# Altium PCB 800U R3N3_LED_V1.2.PcbDoc (part 2 of 2)
Units mm, origin at the board's own origin, x right, y up, seen from the top; angles counter-clockwise.
Board outline 308.48 x 220.22 mm, 4 copper layers (Top Layer, Mid-Layer 2, GND, Bottom Layer); 102 components, 70 nets, 266 pads, 117 vias.
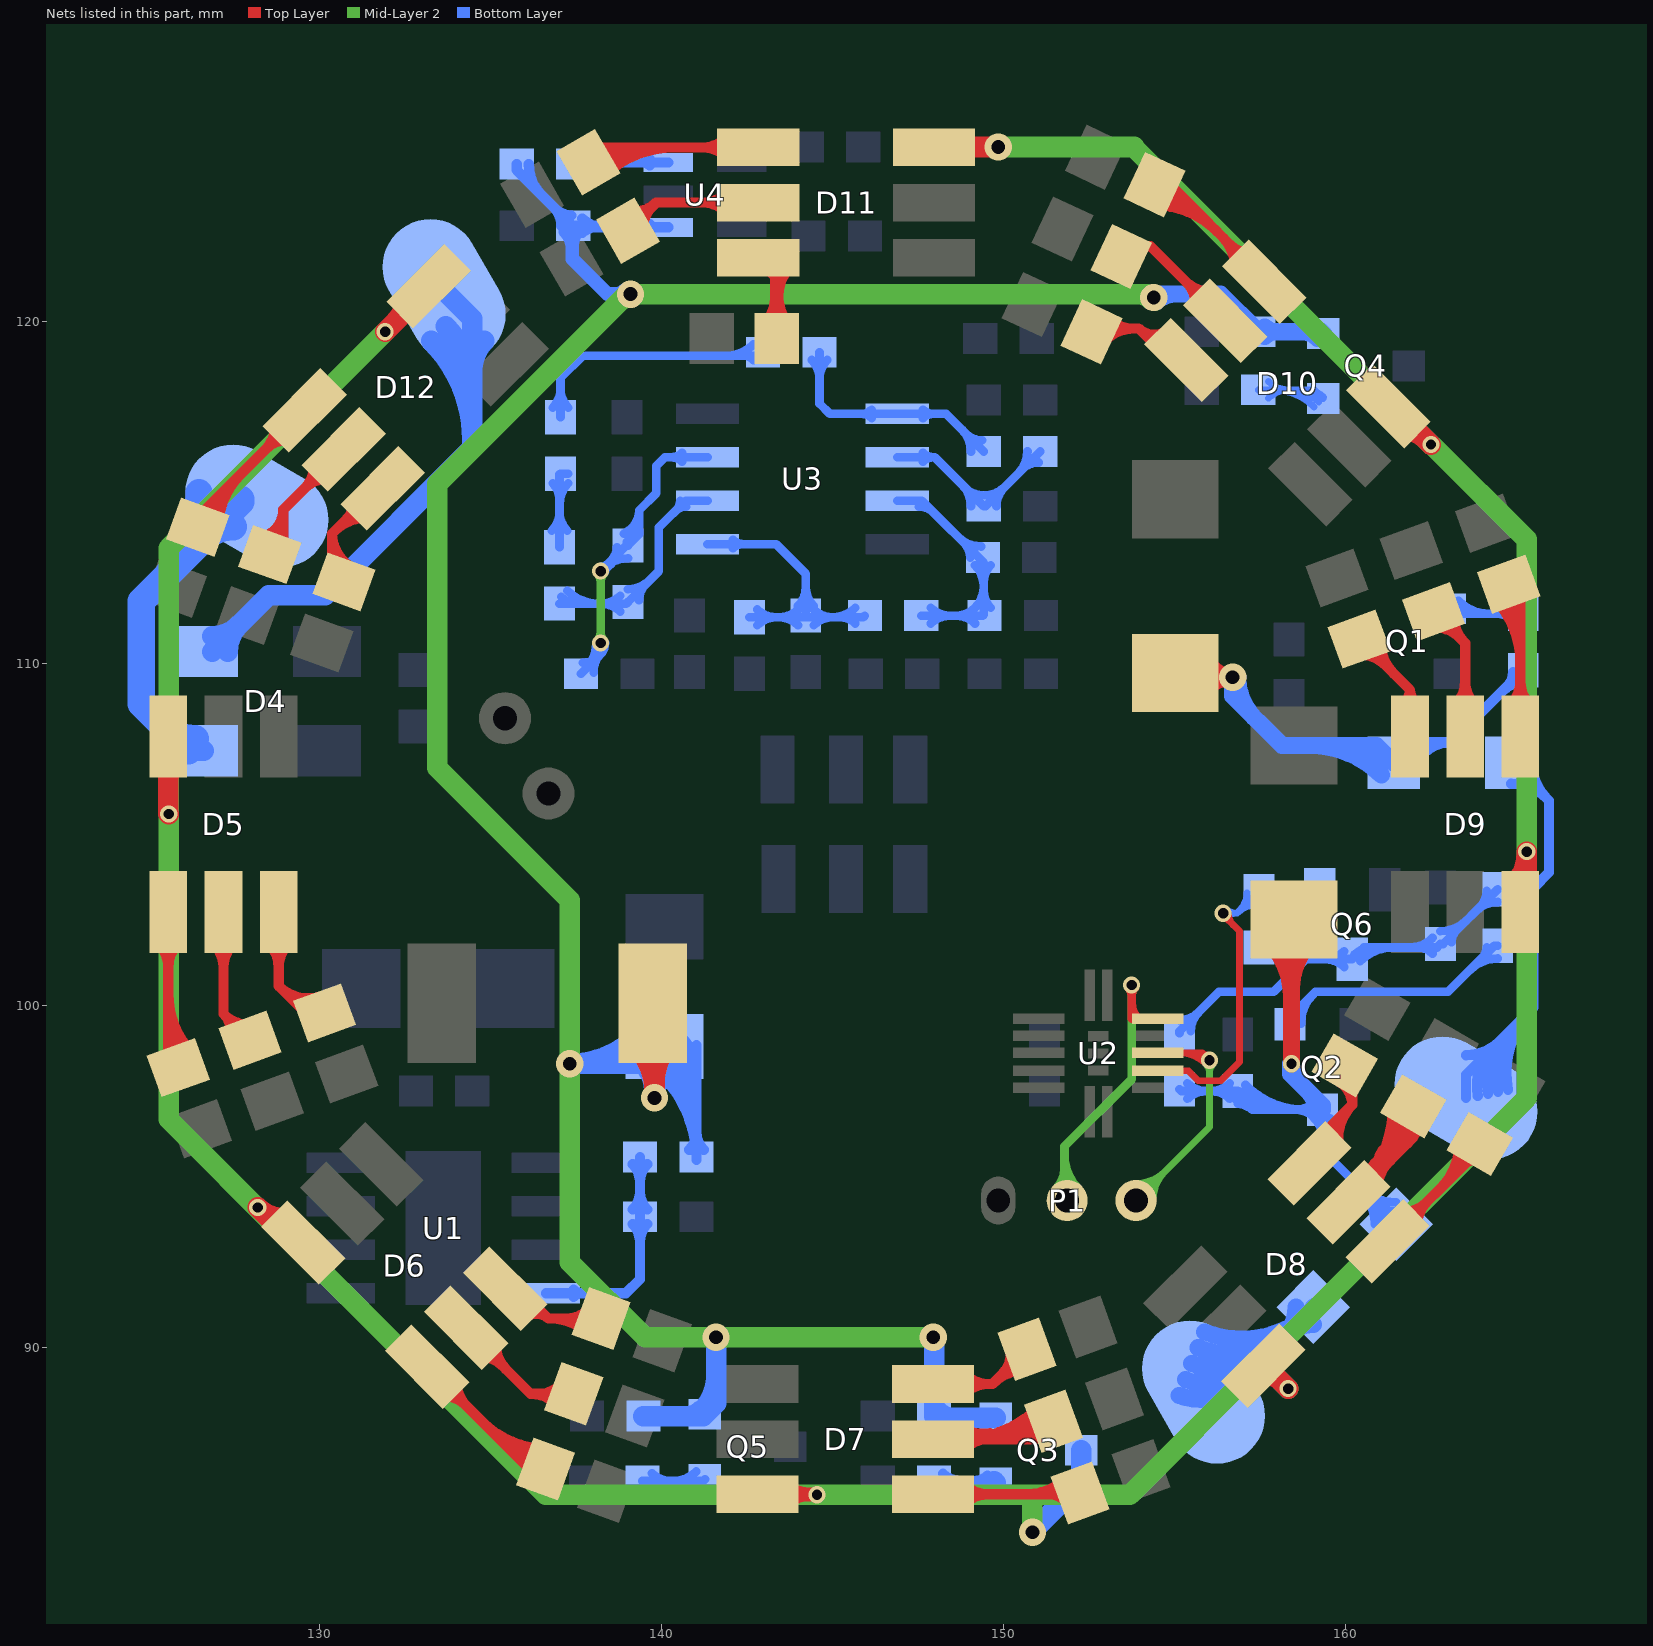
[diagram p4: the nets of this part, all layers, seen from the top]

## Via types
v1: diameter 0.5, hole 0.3, Top Layer to Bottom Layer, 103 vias
v2: diameter 0.8, hole 0.4, Top Layer to Bottom Layer, 12 vias
v3: diameter 0.6, hole 0.3, Top Layer to Bottom Layer, 2 vias

## Nets (pads, with @x,y where several pads share a name; then routed paths per layer and width w, separated by ;. In a path a pad name is that pad's centre, name@x,y a point inside that pad or via, vN(x,y) a via of type N, cw(c..) or ccw(c..) an arc to the next point about the centre after c; other vN are vias at no path point) (continued)
NetC6_1: C6.1 R3.2 | length 9.8
  Bottom Layer w0.254: C6.1@136.822,117.478 ccw(c136.27,118.03) 137.05,118.03 ccw(c137.83,118.03) C6.1@137.278,117.478 ; C6.1@137.05,117.2 137.05,118.35 137.7,119 142.875,119 R3.2@142.975,119.1 ; 141.904,119 ccw(c141.904,120.121) R3.2@142.697,119.328 ; 142.387,119 cw(c142.387,118.562) R3.2@142.697,118.872
NetC6_2: C6.2 R12.1 | length 4.8
  Bottom Layer w0.254: R12.1@136.797,113.878 ccw(c136.245,114.43) 137.025,114.43 ccw(c137.805,114.43) R12.1@137.253,113.878 ; C6.2@136.822,115.272 cw(c136.331,114.781) 137.025,114.781 ; R12.1@137.025,113.4 137.025,115.525 C6.2@137.05,115.55 C6.2@137.275,115.55 ; 137.025,114.66 cw(c137.89,114.66) C6.2@137.278,115.272
NetC9_1: C9.1 R15.2 R16.2 U3.5 | length 14.6
  Bottom Layer w0.254: U3.5@141.35,113.49 143.36,113.49 144.225,112.625 C9.1@144.225,111.4 ; U3.5@142.097,113.368 cw(c142.393,113.072) 142.393,113.49 cw(c142.393,113.908) U3.5@142.097,113.612 ; R16.2@142.575,111.35 145.9,111.35 R15.2@145.95,111.4 ; R16.2@142.803,111.122 cw(c143.355,110.57) 143.355,111.35 cw(c143.355,112.13) R16.2@142.803,111.578 ; C9.1@143.997,111.122 ccw(c143.445,110.57) 143.445,111.35 ccw(c143.445,112.13) C9.1@143.997,111.578 ; C9.1@143.997,111.678 ccw(c143.445,112.23) 144.225,112.23 ccw(c145.005,112.23) C9.1@144.453,111.678 ; C9.1@144.453,111.122 cw(c145.005,110.57) 145.005,111.35 cw(c145.005,112.13) C9.1@144.453,111.578 ; 145,111.35 ccw(c145,112.3) R15.2@145.672,111.628 ; 145.241,111.35 cw(c145.241,110.741) R15.2@145.672,111.172
NetC10_1: C10.1 R14.2 R15.1 U3.3 | length 13.3
  Bottom Layer w0.254: U3.3@146.9,114.76 147.615,114.76 149.425,112.95 149.425,111.425 149.4,111.4 R15.1@147.6,111.4 ; U3.3@147.525,114.587 cw(c147.525,113.952) 147.974,114.401 ; R15.1@147.878,111.172 cw(c148.43,110.62) 148.43,111.4 cw(c148.43,112.18) R15.1@147.878,111.628 ; 148.671,113.704 ccw(c149.35,114.384) C10.1@149.35,113.423 ; 148.852,113.523 cw(c148.428,113.1) C10.1@149.027,113.1 ; R14.2@149.172,111.172 ccw(c148.62,110.62) 148.62,111.4 ccw(c148.62,112.18) 149.172,111.628 ccw(c148.56,112.24) 149.425,112.24 ; C10.1@149.172,112.872 cw(c148.56,112.26) 149.425,112.26 ; 149.425,112.119 ccw(c150.119,112.119) R14.2@149.628,111.628 ; 149.425,112.381 cw(c150.119,112.381) C10.1@149.628,112.872
NetC11_1: C11.1 D3.2 F1.2 Q2.3 R28.2 | length 33
  Top Layer w0.5: D3.2@157.742,101.889 cw(c156.092,100.239) 158.425,100.239 ; v1(158.425,98.3) D3.2@158.425,102.2 ; 158.425,100.49 cw(c160.403,100.49) D3.2@159.004,101.889
  Bottom Layer w0.254: R28.2@155.15,97.55 155.2,97.5 C11.1@156.85,97.5 156.85,97.375 157.275,96.95 ; R28.2@155.378,97.272 cw(c155.93,96.72) 155.93,97.5 cw(c155.93,98.28) R28.2@155.378,97.728 ; C11.1@156.622,97.272 ccw(c156.07,96.72) 156.07,97.5 ccw(c156.07,98.28) C11.1@156.622,97.728 ; C11.1@156.719,97.319 ccw(c157.61,98.21) 157.61,96.95 ; C11.1@156.85,97.127 cw(c156.85,96.528) 157.273,96.952 ; C11.1@156.899,97.499 ccw(c158.224,98.824) 158.224,96.95 ; C11.1@157.078,97.678 ccw(c158.837,99.437) 158.837,96.95 ; C11.1@157.162,97.368 ccw(c157.582,97.257) 157.275,96.95 ; Q2.3@159.097,96.697 cw(c158.545,96.145) 159.325,96.145 cw(c160.105,96.145) Q2.3@159.553,96.697 ; Q2.3@159.097,96.722 ccw(c158.545,96.17) 158.545,96.95 ccw(c158.545,97.73) Q2.3@159.097,97.178 ; F1.2@160.852,93.612 ccw(c159.319,93.612) 160.403,94.696 ccw(c161.487,95.78) F1.2@161.487,94.247 ; F1.2@161.106,93.612 ccw(c160.187,93.612) 160.837,94.263 ccw(c161.487,94.913) F1.2@161.487,93.993 ; F1.2@161.487,93.612 159.325,95.775 Q2.3@159.325,96.95 157.275,96.95
  Bottom Layer w0.5: v1@158.4,98.3 158.4,98 159.325,97.075 Q2.3@159.325,96.95 ; v1(158.425,98.3) ccw(c159.21,98.3) 158.655,97.745 ; 158.913,97.487 cw(c158.401,96.975) Q2.3@159.125,96.975
NetD2_2: D2.2 F2.1 R5.1 | length 24.6
  Top Layer w0.5: D2.2@155.025,109.72 155.145,109.6 v2(156.7,109.6) ; D2.2@155.866,109.183 cw(c156.7,108.557) v2(156.7,109.6) ; D2.2@155.97,110.077 ccw(c156.7,110.396) v2(156.7,109.6)
  Bottom Layer w0.3: F2.1@161.411,107.1 162.011,107.7 163.1,107.7 ; F2.1@161.422,107.096 cw(c162.264,106.811) 162.264,107.7 ; F2.1@161.706,107 cw(c162.682,106.67) 162.682,107.7 ; F2.1@161.99,106.904 cw(c163.1,106.529) 163.1,107.7 ; 164.603,109.203 cw(c165.2,108.605) R5.1@165.2,109.45 ; 164.723,109.323 ccw(c164.296,109.75) R5.1@164.9,109.75 ; R5.1@165.2,109.8 163.1,107.7
  Bottom Layer w0.5: v2(156.7,109.6) 156.7,109.05 158.15,107.6 160.911,107.6 F2.1@161.411,107.1 ; v2@156.85,109.6 ccw(c158.54,109.6) 157.345,108.405 ; 158.967,107.6 cw(c158.967,104.657) F2.1@161.048,106.738 ; 160.174,107.6 cw(c160.174,105.864) F2.1@161.402,107.092
NetD4_2: D4.2 V-.1 | length 23
  Bottom Layer w0.6: D4.2@126.875,110.35 128.525,112 130.175,112 134.475,116.3 134.475,120.075 V-.1@133.65,120.9 ; D4.2@126.875,110.8 ccw(c126.875,111.886) 127.643,111.118 ccw(c128.411,110.35) D4.2@127.325,110.35 ; V-.1@133.272,119.429 cw(c130.368,116.526) 134.475,116.526 ; V-.1@133.696,119.854 cw(c131.817,117.974) 134.475,117.974 ; 134.475,118.578 cw(c135.68,118.578) V-.1@134.828,119.429
NetD4_3: D4.3 V+.1 | length 14.4
  Bottom Layer w0.6: D4.3@126.175,107.45 D4.3@126.625,107.45
  Bottom Layer w0.8: 125.427,112.452 ccw(c122.878,115) V+.1@126.482,115 ; 125.436,108.189 ccw(c126.375,109.128) D4.3@126.375,107.8 ; D4.3@126.175,107.45 124.8,108.825 124.8,111.825 127.7,114.725 V+.1@127.7,114.8 ; 126.616,113.641 cw(c127.482,112.776) V+.1@127.482,114
NetD5_1: D5.1 R17.2 | length 10.4
  Top Layer w0.3: D5.1@125.304,101.802 cw(c124.621,101.119) 125.587,101.119 cw(c126.553,101.119) D5.1@125.87,101.802 ; 125.587,98.901 ccw(c126.65,98.901) R17.2@125.898,98.149 ; 125.587,99.625 ccw(c127.374,99.625) R17.2@126.111,98.361 ; 125.587,100.349 ccw(c128.099,100.349) R17.2@126.323,98.573 ; D5.1@125.587,102.735 125.587,98.473 R17.2@125.875,98.185
NetD5_2: D5.2 R18.2 | length 7
  Top Layer w0.3: D5.2@126.917,101.802 cw(c126.234,101.119) 127.2,101.119 cw(c128.166,101.119) D5.2@127.483,101.802 ; D5.2@127.2,102.735 127.2,99.761 R18.2@127.975,98.985 ; 127.2,99.761 cw(c126.68,99.24) R18.2@127.395,99.068 ; 127.246,99.714 ccw(c127.881,100.349) R18.2@127.881,99.451
NetD5_3: D5.3 R31.2 | length 6.9
  Top Layer w0.3: D5.3@128.53,101.802 cw(c127.847,101.119) 128.813,101.119 cw(c129.779,101.119) D5.3@129.096,101.802 ; D5.3@128.813,102.735 128.813,100.573 R31.2@129.6,99.785 ; 128.813,100.572 ccw(c129.685,101.445) R31.2@129.949,100.24 ; 129.201,100.185 ccw(c129.825,100.809) R31.2@130.013,99.947
NetD6_1: D6.1 R32.2 | length 10.7
  Top Layer w0.3: D6.1@133.155,89.445 136.15,86.45 R32.2@136.615,86.45 ; D6.1@133.614,88.586 cw(c133.614,87.62) 134.297,88.303 cw(c134.98,88.986) D6.1@134.014,88.986 ; 134.784,87.816 ccw(c136.649,89.681) R32.2@136.649,87.044 ; 135.296,87.304 ccw(c136.649,88.657) R32.2@136.649,86.744 ; 135.808,86.792 ccw(c136.649,87.633) R32.2@136.649,86.444
NetD6_2: D6.2 R33.2 | length 7.2
  Top Layer w0.3: D6.2@134.295,90.586 134.295,90.53 136.175,88.65 ; D6.2@134.755,89.726 cw(c134.755,88.896) 135.342,89.483 ; D6.2@135.155,90.126 ccw(c136.256,90.126) 135.477,89.348 ; 136.425,88.65 ccw(c136.425,89.536) R33.2@137.052,88.909 ; R33.2@137.014,88.245 ccw(c136.175,87.579) 136.175,88.65 ; R33.2@137.44,88.65 136.175,88.65
NetD6_3: D6.3 R34.2 | length 6.9
  Top Layer w0.3: D6.3@135.436,91.726 135.824,91.726 136.7,90.85 ; D6.3@135.947,91.181 cw(c136.149,90.843) D6.3@136.428,91.122 ; D6.3@136.101,90.924 cw(c136.353,90.503) 136.7,90.85 ; 136.771,90.85 cw(c136.771,89.322) R34.2@137.852,90.402 ; 137.225,90.85 ccw(c137.225,91.736) R34.2@137.852,91.109 ; 137.496,90.85 cw(c137.496,90.046) R34.2@138.064,90.614 ; R34.2@138.24,90.85 136.7,90.85
NetD7_1: D7.1 R35.2 | length 8.5
  Top Layer w0.3: D7.1@147.94,85.712 152.202,85.712 R35.2@152.24,85.75 ; D7.1@148.873,85.429 cw(c149.556,84.746) 149.556,85.712 cw(c149.556,86.678) D7.1@148.873,85.995 ; 150.68,85.712 ccw(c150.68,87.37) R35.2@151.852,86.198 ; 151.317,85.712 cw(c151.317,84.956) R35.2@151.852,85.491 ; 151.404,85.712 ccw(c151.404,86.646) R35.2@152.064,85.986
NetD7_2: D7.2 R36.2 | length 14.4
  Top Layer w0.3: D7.2@147.94,87.325 150.939,87.325 ; D7.2@148.729,87.325 ccw(c148.729,90.646) R36.2@151.077,88.298 ; D7.2@148.812,87.658 ccw(c149.398,88.54) 149.607,87.502 ; D7.2@148.873,87.042 cw(c149.556,86.359) 149.556,87.325 cw(c149.556,88.291) D7.2@148.873,87.608 ; D7.2@148.924,87.104 cw(c149.65,86.621) 149.478,87.476 ; 149.453,87.325 ccw(c149.453,89.922) R36.2@151.289,88.086 ; 150.177,87.325 ccw(c150.177,89.197) R36.2@151.501,87.873 ; 150.901,87.325 ccw(c150.901,88.473) R36.2@151.713,87.661 ; R36.2@151.017,87.622 cw(c150.725,87.54) 150.939,87.325 ; R36.2@151.21,87.348 ccw(c151.088,87.176) 150.939,87.325 ; R36.2@151.465,87.85 150.939,87.325
NetD7_3: D7.3 R37.2 | length 7.1
  Top Layer w0.3: D7.3@147.94,88.938 149.677,88.938 ; D7.3@148.873,88.655 cw(c149.556,87.972) 149.556,88.938 cw(c149.556,89.904) D7.3@148.873,89.221 ; 149.961,89.221 ccw(c149.326,89.856) R37.2@150.224,89.856 ; 150.176,89.437 cw(c150.706,88.907) R37.2@150.72,89.656 ; R37.2@150.69,89.95 149.677,88.938 ; R37.2@150.714,89.356 ccw(c150.688,87.927) 149.677,88.938
NetD8_1: D8.1 R38.2 | length 8.3
  Top Layer w0.3: D8.1@161.23,93.105 163.925,95.8 R38.2@163.925,95.955 ; D8.1@161.689,93.964 ccw(c161.689,94.93) 162.372,94.247 ccw(c163.055,93.564) D8.1@162.089,93.564 ; 162.779,94.654 ccw(c161.429,96.005) R38.2@163.338,96.005 ; 163.291,95.166 ccw(c162.453,96.005) R38.2@163.638,96.005 ; 163.482,95.357 cw(c163.838,95) R38.2@163.838,95.505
NetD8_2: D8.2 R39.2 | length 17.7
  Top Layer w0.3: D8.2@160.089,94.245 161.975,96.131 R39.2@161.975,97.055 ; D8.2@160.285,94.441 ccw(c157.622,97.105) R39.2@161.388,97.105 ; D8.2@160.451,95.093 ccw(c160.292,95.73) 160.855,95.392 ; D8.2@160.476,95.098 ccw(c160.263,96.261) 161.236,95.59 ; D8.2@160.549,95.105 ccw(c160.549,96.07) 161.231,95.388 ccw(c161.914,94.705) D8.2@160.949,94.705 ; D8.2@160.797,94.953 ccw(c158.646,97.105) R39.2@161.688,97.105 ; D8.2@160.937,94.802 cw(c162.173,95.111) 161.08,95.767 ; D8.2@160.942,94.777 cw(c161.679,94.912) 161.062,95.337 ; 161.31,95.466 ccw(c159.671,97.105) R39.2@161.988,97.105 ; R39.2@161.743,96.619 cw(c161.336,96.127) 161.975,96.127 cw(c162.425,96.127) R39.2@162.253,96.543 ; 161.822,95.978 ccw(c160.695,97.105) R39.2@162.288,97.105
NetD8_3: D8.3 R40.2 | length 7
  Top Layer w0.3: D8.3@158.949,95.386 158.949,95.849 160.2,97.1 ; D8.3@159.507,95.86 cw(c160.456,95.999) 159.778,96.678 ; D8.3@159.804,95.903 cw(c161.192,96.108) 160.2,97.1 ; R40.2@159.809,97.773 cw(c159.41,97.091) 160.2,97.091 ; R40.2@160.049,98.18 160.2,98.03 160.2,97.1 ; 160.2,97.332 cw(c160.935,97.332) R40.2@160.415,97.851
NetD9_1: D9.1 R41.2 | length 10.7
  Top Layer w0.3: R41.2@164.327,111.927 cw(c162.431,110.03) 165.113,110.03 ; R41.2@164.539,112.139 cw(c163.155,110.755) 165.113,110.755 ; R41.2@164.752,112.351 cw(c163.879,111.479) 165.113,111.479 ; R41.2@164.775,112.315 165.113,111.977 D9.1@165.113,107.865 ; D9.1@164.83,108.798 ccw(c164.147,109.481) 165.113,109.481 ccw(c166.079,109.481) D9.1@165.396,108.798
NetD9_2: D9.2 R42.2 | length 7.3
  Top Layer w0.3: R42.2@162.575,111.515 163.5,110.589 ; R42.2@162.669,111.049 cw(c162.669,110.151) 163.304,110.786 ; R42.2@163.167,111.505 ccw(c164.315,111.404) 163.5,110.589 ; D9.2@163.217,108.798 ccw(c162.534,109.481) 163.5,109.481 ccw(c164.466,109.481) D9.2@163.783,108.798 ; D9.2@163.5,107.865 163.5,110.589
NetD9_3: D9.3 R43.2 | length 6.9
  Top Layer w0.3: R43.2@160.4,110.715 161.887,109.227 ; R43.2@160.494,110.249 cw(c160.494,109.351) 161.129,109.986 ; R43.2@160.694,110.749 ccw(c161.486,110.749) 160.926,110.189 ; R43.2@160.994,110.749 ccw(c162.51,110.749) 161.438,109.676 ; D9.3@161.679,108.857 ccw(c161.454,109.227) 161.887,109.227 ; D9.3@161.887,107.865 161.887,109.227 ; D9.3@162.095,108.857 cw(c162.321,109.227) 161.887,109.227
NetD10_1: D10.1 R44.2 | length 10.4
  Top Layer w0.3: R44.2@154.38,123.406 cw(c154.38,120.778) 156.239,122.636 ; R44.2@154.38,123.706 cw(c154.38,121.802) 155.726,123.149 ; R44.2@154.38,124.006 cw(c154.38,122.826) 155.214,123.661 ; R44.2@154.422,123.997 154.878,123.997 157.181,121.694 157.181,121.6 D10.1@157.626,121.155 ; 156.418,122.457 cw(c155.574,121.614) D10.1@156.767,121.614 ; 156.645,122.23 ccw(c157.167,122.753) D10.1@157.167,122.014
NetD10_2: D10.2 R45.2 | length 5.6
  Top Layer w0.3: R45.2@153.447,121.897 153.75,122.2 154.3,122.2 D10.2@156.486,120.014 ; D10.2@155.626,120.474 ccw(c154.661,120.474) 155.344,121.156 ccw(c156.026,121.839) D10.2@156.026,120.874
NetD10_3: D10.3 R47.2 | length 6.6
  Top Layer w0.3: R47.2@152.472,119.797 153.953,119.797 ; R47.2@152.968,119.434 cw(c153.844,118.558) 153.844,119.797 ; R47.2@152.968,120.141 ccw(c153.799,120.972) 153.799,119.797 ; 154.239,119.511 ccw(c154.599,119.871) D10.3@154.839,119.421 ; D10.3@154.698,119.686 cw(c154.4,120.244) 153.953,119.797 ; D10.3@155.345,118.874 154.876,118.874 153.953,119.797
NetD11_1: D11.1 R48.2 | length 12
  Top Layer w0.3: R48.2@137.85,124.634 cw(c138.945,123.539) 138.945,125.088 ; R48.2@137.87,124.65 138.308,125.088 D11.1@142.835,125.088 ; R48.2@138.062,124.422 cw(c139.67,122.814) 139.67,125.088 ; R48.2@138.274,124.21 cw(c140.394,122.09) 140.394,125.088 ; D11.1@141.902,124.805 ccw(c141.219,124.122) 141.219,125.088 ccw(c141.219,126.054) D11.1@141.902,125.371
NetD11_2: D11.2 R49.2 | length 7.2
  Top Layer w0.3: R49.2@139.02,122.65 139.845,123.475 D11.2@142.835,123.475 ; R49.2@139.059,123.229 ccw(c139.217,124.104) 139.845,123.475 ; R49.2@139.47,122.737 cw(c140.348,122.737) 139.727,123.357 ; D11.2@141.902,123.192 ccw(c141.219,122.509) 141.219,123.475 ccw(c141.219,124.441) D11.2@141.902,123.758
NetD11_3: D11.3 R50.2 | length 5.6
  Top Layer w0.4: D11.3@142.835,121.862 143.375,121.322 R50.2@143.375,119.5 ; R50.2@143.057,119.918 ccw(c142.289,120.686) 143.375,120.686 ccw(c144.461,120.686) R50.2@143.693,119.918 ; D11.3@143.237,121.615 cw(c142.904,121.282) 143.375,121.282 ; 143.375,120.753 cw(c144.594,120.753) D11.3@143.732,121.615
NetD12_1: D12.1 R51.2 | length 9.2
  Top Layer w0.3: R51.2@126.45,113.985 126.45,114.281 D12.1@129.57,117.401 ; R51.2@126.744,113.951 cw(c128.249,113.951) 127.185,115.016 ; R51.2@127.044,113.951 cw(c129.274,113.951) 127.697,115.528 ; D12.1@128.711,116.942 cw(c127.745,116.942) 128.428,116.259 cw(c129.111,115.576) D12.1@129.111,116.542
NetD12_2: D12.2 R52.2 | length 8.4
  Top Layer w0.3: R52.2@128.332,113.704 ccw(c128.128,114.5) 128.95,114.5 ; R52.2@128.406,113.413 ccw(c128.227,114.114) 128.95,114.114 ; R52.2@128.481,113.123 ccw(c128.326,113.727) R52.2@128.95,113.727 ; R52.2@128.55,113.185 128.95,113.586 128.95,114.5 ; D12.2@129.851,115.801 cw(c128.886,115.801) 129.569,115.119 cw(c130.251,114.436) D12.2@130.251,115.401 ; D12.2@130.711,116.261 128.95,114.5
NetD12_3: D12.3 R25.2 | length 6.7
  Top Layer w0.3: 130.375,113.252 ccw(c131.163,113.252) R25.2@130.739,112.588 ; 130.443,113.868 cw(c131.392,112.919) D12.3@131.392,114.261 ; R25.2@130.493,112.617 130.375,112.735 130.375,113.8 ; 130.819,114.244 ccw(c130.403,114.661) D12.3@130.992,114.661 ; R25.2@130.9,112.841 cw(c131.513,113.8) 130.375,113.8 ; D12.3@131.851,115.12 131.695,115.12 130.375,113.8
NetF1_1: F1.1 OUT.1 | length 19.7
  Bottom Layer w0.5: OUT.1@155.134,88.604 ccw(c155.75,90.14) OUT.1@156.92,88.97 ; OUT.1@155.32,89.068 ccw(c156.056,90.905) 157.455,89.505 ; OUT.1@155.506,89.532 ccw(c156.363,91.67) 157.991,90.041 ; OUT.1@155.692,89.996 ccw(c156.669,92.434) 158.527,90.577 ; OUT.1@155.878,90.46 ccw(c156.976,93.199) F1.1@159.063,91.113 ; OUT.1@156.05,88.1 F1.1@159.063,91.113 ; 158.136,90.186 ccw(c157.134,91.188) F1.1@158.551,91.188 ; 158.317,90.367 cw(c159.063,89.621) F1.1@159.063,90.676 ; F1.1@159.063,91.188 F1.1@159.063,91.113
NetF2_2: F2.2 SIN.1 | length 22.9
  Bottom Layer w0.3: SIN.1@163.525,97.3 163.525,97.975 165.5,99.95 ; SIN.1@163.525,98.55 ccw(c163.525,99.938) 164.507,98.957 ; SIN.1@163.869,97.365 cw(c165.388,97.652) 164.295,98.745 ; SIN.1@164.164,97.421 cw(c166.064,97.779) 164.697,99.147 ; SIN.1@164.459,97.476 cw(c166.74,97.907) 165.098,99.548 ; SIN.1@164.753,97.532 cw(c167.416,98.034) 165.5,99.95 ; F2.2@164.84,106.488 cw(c164.84,105.01) 165.884,106.055 cw(c166.929,107.1) F2.2@165.452,107.1 ; F2.2@164.84,107.1 165.95,105.99 165.95,103.9 165.5,103.45 165.5,99.95
NetP1_2: P1.2 U2.10 | length 12.6
  Top Layer w0.254: v1@153.663,100.513 cw(c153.453,100.303) 153.75,100.303 cw(c154.047,100.303) v1@153.837,100.513 ; 153.75,100.078 ccw(c154.374,100.078) U2.10@153.933,99.636 ; v1(153.75,100.6) 153.75,99.618 U2.10@154.337,99.618
  Mid-Layer 2 w0.254: P1.2@151.531,94.634 ccw(c150.916,95.249) 151.785,95.249 ; P1.2@151.785,94.2 151.785,95.885 153.75,97.85 v1(153.75,100.6) ; 151.785,95.022 ccw(c152.587,95.022) P1.2@152.02,94.455 ; 151.785,95.635 ccw(c153.2,95.635) P1.2@152.199,94.634 ; v1@153.663,100.513 cw(c153.453,100.303) 153.75,100.303 cw(c154.047,100.303) v1@153.837,100.513
NetP1_3: P1.3 U2.8 | length 12.2
  Top Layer w0.2: U2.8@154.337,98.618 155.807,98.618 ; U2.8@155.135,98.618 cw(c155.135,97.51) v1@155.919,98.294 ; 155.618,98.618 cw(c155.618,97.993) v1@156.06,98.435 ; v1@155.876,98.418 ccw(c155.635,98.446) 155.807,98.618 ; v1@156.007,98.549 cw(c155.979,98.79) 155.807,98.618 ; v1(156.025,98.4) 155.807,98.618
  Mid-Layer 2 w0.2: P1.3@153.875,94.3 156.025,96.45 v1(156.025,98.4) ; P1.3@153.875,94.6 ccw(c153.875,95.324) 154.387,94.812 ccw(c154.899,94.3) P1.3@154.175,94.3 ; P1.3@153.875,94.8 ccw(c153.875,96.007) 154.729,95.154 ccw(c155.582,94.3) P1.3@154.375,94.3 ; v1@155.919,98.294 cw(c155.663,98.038) 156.025,98.038 cw(c156.387,98.038) v1@156.131,98.294
NetQ1_1: Q1.1 R5.2 | length 5
  Bottom Layer w0.254: Q1.1@163.05,111.6 163.2,111.45 R5.2@165.2,111.45 ; Q1.1@163.124,111.649 ccw(c163.604,112.129) 163.604,111.45 ; Q1.1@163.303,111.828 ccw(c164.217,112.742) 164.217,111.45 ; R5.2@164.972,111.222 ccw(c164.42,110.67) 164.42,111.45 ccw(c164.42,112.23) R5.2@164.972,111.678
NetQ2_1: Q2.1 R24.2 | length 10.1
  Bottom Layer w0.254: Q2.1@158.375,99.45 158.375,99.65 159.125,100.4 163,100.4 164.35,101.75 R24.2@164.45,101.75 ; Q2.1@158.375,99.798 ccw(c158.375,100.155) Q2.1@158.628,99.903 ; Q2.1@158.444,99.475 cw(c159.033,99.475) Q2.1@158.617,99.892 ; Q2.1@158.698,99.475 cw(c159.9,99.475) 159.05,100.325 ; 163.643,101.043 cw(c164.45,100.235) R24.2@164.45,101.377 ; R24.2@164.005,101.405 ccw(c163.709,101.7) R24.2@164.127,101.7
NetQ3_1: Q3.1 R4.1 | length 4.1
  Bottom Layer w0.3: R4.1@147.975,86.1 Q3.1@149.725,86.1 ; R4.1@148.237,85.888 cw(c148.749,85.376) 148.749,86.1 cw(c148.749,86.824) R4.1@148.237,86.312 ; 148.905,86.1 cw(c148.905,85.205) Q3.1@149.538,85.838 ; 149.146,86.1 ccw(c149.146,86.654) Q3.1@149.538,86.262
  Bottom Layer w0.6: Q3.1@149.725,86.1 Q3.1@149.775,86.05
NetQ4_1: Q4.1 R19.1 | length 6.2
  Bottom Layer w0.2: R19.1@157.45,118 159.1,118 Q4.1@159.35,117.75 ; R19.1@157.747,117.753 cw(c158.345,117.155) 158.345,118 cw(c158.345,118.845) R19.1@157.747,118.247 ; R19.1@157.876,118 cw(c157.876,116.301) Q4.1@159.078,117.503 ; 158.359,118 cw(c158.359,116.784) Q4.1@159.219,117.644 ; 158.842,118 cw(c158.842,117.267) Q4.1@159.36,117.785
NetQ5_1: Q5.1 R21.1 | length 4.3
  Bottom Layer w0.254: R21.1@139.45,86.1 141.225,86.1 Q5.1@141.275,86.15 ; R21.1@139.728,85.872 cw(c140.28,85.32) 140.28,86.1 cw(c140.28,86.88) R21.1@139.728,86.328 ; 140.349,86.1 ccw(c140.349,87.05) Q5.1@141.022,86.378 ; 140.591,86.1 cw(c140.591,85.491) Q5.1@141.022,85.922
NetQ6_1: Q6.1 R29.1 | length 5.4
  Bottom Layer w0.254: R29.1@157.475,101.7 157.557,101.7 Q6.1@159.247,103.391 ; R29.1@157.475,102.073 ccw(c157.475,103.171) 158.252,102.395 ; R29.1@157.798,101.75 cw(c158.259,101.75) 157.933,102.076 ; 158.38,102.523 cw(c159.247,101.656) Q6.1@159.247,102.883 ; Q6.1@158.81,102.953 ccw(c158.549,103.213) Q6.1@158.917,103.213 ; Q6.1@158.814,102.957 cw(c159.247,102.523) Q6.1@159.247,103.137
NetQ6_3: Q6.3 R23.1 R24.1 R28.1 | length 18.9
  Bottom Layer w0.254: R28.1@155.15,99.2 155.15,99.25 156.3,100.4 157.9,100.4 158.859,101.359 Q6.3@160.2,101.359 160.541,101.7 162.675,101.7 R23.1@162.775,101.8 162.85,101.8 R24.1@164.45,103.4 ; R28.1@155.15,99.573 ccw(c155.15,100.353) 155.701,99.801 ccw(c156.253,99.25) R28.1@155.473,99.25 ; Q6.3@159.967,101.125 ccw(c159.403,100.561) 159.403,101.359 ccw(c159.403,102.156) Q6.3@159.967,101.592 ; Q6.3@160.254,101.483 cw(c160.779,100.957) 160.779,101.7 ; Q6.3@160.433,101.303 cw(c161.392,100.344) 161.392,101.7 ; 161.875,101.7 ccw(c161.875,102.65) R23.1@162.547,101.978 ; 162.116,101.7 cw(c162.116,101.091) R23.1@162.547,101.522 ; R23.1@162.775,102.173 ccw(c162.775,103.255) 163.54,102.49 ; R23.1@163.098,101.85 cw(c163.576,101.85) 163.238,102.188 ; 163.813,102.763 cw(c164.45,102.127) R24.1@164.45,103.027 ; 163.934,102.884 ccw(c163.468,103.35) R24.1@164.127,103.35
NetR2_1: R2.1 R12.2 U3.6 | length 11
  Bottom Layer w0.254: R12.2@137.025,111.75 138.975,111.75 R2.1@139.025,111.8 139.925,112.7 139.925,113.975 140.71,114.76 U3.6@141.35,114.76 ; R12.2@137.074,111.949 ccw(c137.554,112.429) 137.554,111.75 ; R12.2@137.253,112.128 ccw(c138.167,113.042) 138.167,111.75 ; 138.245,111.75 ccw(c138.245,112.53) R2.1@138.797,111.978 ; 138.245,111.75 cw(c138.245,110.97) R2.1@138.797,111.522 ; R2.1@139.025,112.173 ccw(c139.025,113.073) 139.662,112.437 ; R2.1@139.348,111.85 cw(c140.007,111.85) 139.541,112.316 ; 140.404,114.454 cw(c140.725,114.133) U3.6@140.725,114.587 ; U3.6@140.44,114.49 ccw(c140.171,114.76) U3.6@140.552,114.76
NetR2_2: R2.2 R13.1 U3.7 | length 16.6
  Mid-Layer 2 w0.254: v1@138.138,110.687 ccw(c137.928,110.897) 138.225,110.897 ccw(c138.522,110.897) v1@138.312,110.687 ; v1@138.138,112.613 cw(c137.928,112.403) 138.225,112.403 cw(c138.522,112.403) v1@138.312,112.613 ; v1(138.225,110.6) v1(138.225,112.7)
  Bottom Layer w0.254: R13.1@137.65,109.7 138.225,110.275 ; R13.1@137.7,110.023 ccw(c137.7,110.682) 138.166,110.216 ; R13.1@137.785,109.835 ccw(c137.02,110.6) v1@138.102,110.6 ; R13.1@138.022,109.725 cw(c138.72,109.78) 138.225,110.275 ; v1@138.138,110.513 cw(c137.928,110.303) 138.225,110.303 cw(c138.522,110.303) v1@138.312,110.513 ; 138.219,110.269 ccw(c137.888,110.6) v1@138.356,110.6 ; v1(138.225,110.6) 138.225,110.275 ; v1(138.225,112.7) 138.975,113.45 R2.2@139.025,113.45 139.35,113.775 139.35,114.475 ; v1@138.225,112.823 ccw(c138.225,113.12) 138.435,112.91 ccw(c138.645,112.7) v1@138.348,112.7 ; v1@138.303,112.778 cw(c139.025,112.056) R2.2@139.025,113.077 ; v1@138.344,112.668 cw(c138.725,112.566) 138.528,112.908 ; 138.544,113.019 ccw(c138.164,113.4) R2.2@138.702,113.4 ; R2.2@138.9,113.798 ccw(c138.616,114.475) 139.35,114.475 ; R2.2@138.998,113.564 ccw(c138.776,114.093) 139.35,114.093 ; U3.7@140.603,115.908 ccw(c140.307,115.612) 140.307,116.03 ccw(c140.307,116.448) U3.7@140.603,116.152 ; U3.7@141.35,116.03 140.105,116.03 139.85,115.775 139.85,114.975 139.35,114.475
NetR3_1: R3.1 R7.2 U3.1 | length 10.6
  Bottom Layer w0.254: R3.1@144.397,118.872 cw(c143.845,118.32) 144.625,118.32 cw(c145.405,118.32) R3.1@144.853,118.872 ; R3.1@144.625,119.1 144.625,117.6 144.925,117.3 U3.1@146.9,117.3 148.325,117.3 R7.2@149.425,116.2 ; U3.1@146.153,117.178 ccw(c145.857,116.882) 145.857,117.3 ccw(c145.857,117.718) U3.1@146.153,117.422 ; U3.1@147.647,117.178 cw(c147.943,116.882) 147.943,117.3 cw(c147.943,117.718) U3.1@147.647,117.422 ; 148.788,116.837 cw(c148.151,116.2) R7.2@149.052,116.2 ; 148.909,116.716 ccw(c149.375,117.182) R7.2@149.375,116.523
NetR7_1: R7.1 R10.2 U3.2 | length 9.8
  Bottom Layer w0.254: U3.2@146.9,116.03 147.995,116.03 R10.2@149.425,114.6 149.475,114.6 R7.1@151.075,116.2 ; U3.2@147.647,115.908 cw(c147.943,115.612) 147.943,116.03 cw(c147.943,116.448) U3.2@147.647,116.152 ; 148.788,115.237 cw(c148.152,114.6) R10.2@149.052,114.6 ; 148.909,115.116 ccw(c149.375,115.582) R10.2@149.375,114.923 ; R10.2@149.475,114.923 ccw(c149.475,115.703) 150.026,115.151 ccw(c150.578,114.6) R10.2@149.798,114.6 ; 150.438,115.563 ccw(c149.802,116.2) R7.1@150.702,116.2 ; 150.559,115.684 cw(c151.025,115.218) R7.1@151.025,115.877
NetR9_1: R9.1 R11.2 U1.4 | length 10.5
  Bottom Layer w0.3: U1.4@136.625,91.59 138.965,91.59 139.375,92 R11.2@139.375,93.825 R9.1@139.375,95.575 ; U1.4@137.431,91.484 cw(c137.687,91.228) 137.687,91.59 cw(c137.687,91.952) U1.4@137.431,91.696 ; R11.2@139.163,93.613 cw(c138.651,93.101) 139.375,93.101 cw(c140.099,93.101) R11.2@139.587,93.613 ; R11.2@139.163,94.037 ccw(c138.651,94.549) 139.375,94.549 ccw(c140.099,94.549) R11.2@139.587,94.037 ; R9.1@139.163,95.363 cw(c138.651,94.851) 139.375,94.851 cw(c140.099,94.851) R9.1@139.587,95.363
NetR26_2: R26.2 U4.3 | length 4.4
  Bottom Layer w0.3: R26.2@137.475,124.6 137.525,124.65 U4.3@140.2,124.65 ; R26.2@137.687,124.388 cw(c138.32,123.755) 138.32,124.65 ; R26.2@137.687,124.812 ccw(c138.079,125.204) 138.079,124.65 ; U4.3@139.662,124.562 ccw(c139.448,124.348) 139.448,124.65 ccw(c139.448,124.952) U4.3@139.662,124.738
OUTPUT: R29.2 U2.7 | length 11.3
  Top Layer w0.2: U2.7@154.337,98.093 155.407,98.093 155.7,97.8 156.35,97.8 156.9,98.35 156.9,102.175 v1@156.375,102.7 ; v1@156.425,102.55 cw(c156.425,102.309) 156.596,102.479 ; v1@156.575,102.7 ccw(c157.058,102.7) 156.716,102.359
  Bottom Layer w0.2: v1@156.375,102.7 v1(156.425,102.7) 156.825,102.7 ; v1@156.531,102.594 cw(c156.787,102.338) 156.787,102.7 cw(c156.787,103.062) v1@156.531,102.806 ; 156.913,102.788 ccw(c156.401,103.3) R29.2@157.125,103.3 ; R29.2@157.462,102.95 ccw(c157.43,102.095) 156.825,102.7 ; R29.2@157.475,103.35 156.825,102.7
RED: D5.6 D6.6 D7.6 D8.6 D9.6 D10.6 D11.6 D12.6 Q3.3 | length 138.4
  Top Layer w0.4: D7.6@142.81,85.712 v1@144.538,85.712 ; D7.6@143.707,85.465 cw(c144.305,84.867) 144.305,85.712 cw(c144.305,86.557) D7.6@143.707,85.96 ; 144.239,85.694 cw(c144.336,85.33) v1@144.525,85.657 ; 144.299,85.714 ccw(c144.376,86.001) v1@144.525,85.743
  Top Layer w0.6: D5.6@125.41,107.039 cw(c124.984,106.612) 125.587,106.612 cw(c126.191,106.612) D5.6@125.764,107.039 ; D5.6@125.587,107.865 125.587,105.613 v1(125.6,105.6) ; D6.6@129.049,93.783 cw(c128.973,94.873) v1(128.2,94.1) 129.226,93.074 D6.6@129.527,93.074 ; v1(131.925,119.7) 133.199,120.974 D12.6@133.199,121.03 ; 132.273,120.048 ccw(c131.75,120.57) D12.6@132.489,120.57 ; D11.6@147.75,125.1 v2@149.722,125.1 ; D11.6@148.792,124.911 cw(c149.248,124.455) 149.248,125.1 ; D11.6@148.792,125.265 ccw(c149.19,125.662) 149.19,125.1 ; D8.6@157.601,89.227 cw(c157.601,88.51) 158.108,89.017 ; D8.6@157.601,89.477 D8.6@157.601,89.601 ; D8.6@157.625,89.5 v1(158.325,88.8) ; D10.6@161.374,117.526 v1(162.5,116.4) ; D10.6@161.714,116.817 cw(c161.714,115.926) v1@162.344,116.556 ; D9.6@164.936,103.561 ccw(c164.058,104.44) v1@165.3,104.44 ; D9.6@165.113,102.735 165.3,102.922 v1(165.3,104.5)
  Mid-Layer 2 w0.6: 128.775,93.55 136.625,85.7 v1@144.538,85.7 ; 129,93.275 125.6,96.675 v1(125.6,105.6) 125.6,113.375 v1(131.925,119.7) ; v1(144.55,85.7) 153.7,85.7 157.6,89.6 ; v2(149.85,125.1) 153.825,125.1 153.825,125.075 v1(162.5,116.4) ; 150.85,85.65 v2(150.85,84.6) v2@150.9,84.65 ; v1(158.325,88.8) 157.6,89.525 157.6,89.6 ; v1@162.512,116.413 165.3,113.625 v1(165.3,104.5) 165.3,97.3 157.6,89.6
  Bottom Layer w0.6: v2@150.825,84.6 v2(150.85,84.6) ; v2@150.837,84.613 152.275,86.05 Q3.3@152.275,87
VDD_+5V: C2.1 C13.1 L1.2 Q3.2 Q4.2 Q5.2 R6.1 R9.2 R20.1 R22.1 R26.1 U4.1 | length 122
  Top Layer w0.6: L1.2@139.251,98.822 cw(c137.926,97.497) v2@139.8,97.497 ; v2(139.8,97.3) L1.2@139.8,99.612 ; 139.8,97.757 cw(c141.306,97.757) L1.2@140.241,98.822
  Mid-Layer 2 w0.6: 138.759,120.559 cw(c139.1,120.217) v2@139.1,120.7 ; v2(147.95,90.3) v2(141.6,90.3) 139.525,90.3 137.325,92.5 v2(137.325,98.3) 137.325,103.075 133.45,106.95 133.45,115.25 139,120.8 v2(139.1,120.8) 154.225,120.8 v2@154.425,120.6 ; 153.917,120.8 cw(c153.917,120.217) v2@154.329,120.629
  Bottom Layer w0.3: R26.1@135.775,124.6 135.775,124.425 C13.1@137.4,122.8 ; R26.1@136.125,124.6 ccw(c137.392,124.6) 136.496,123.704 ; 136.845,123.355 cw(c136.29,122.8) C13.1@137.075,122.8 ; 136.906,123.294 ccw(c137.375,123.764) C13.1@137.375,123.1 ; C13.1@137.4,122.756 C13.1@137.4,122.8 ; C13.1@137.687,122.588 cw(c138.079,122.196) 138.079,122.75 ; C13.1@137.687,123.012 ccw(c138.32,123.645) 138.32,122.75 ; U4.1@139.662,122.662 ccw(c139.448,122.448) 139.448,122.75 ccw(c139.448,123.052) U4.1@139.662,122.838 ; C2.1@139.768,98.187 cw(c137.504,95.491) R9.2@141.025,95.491 ; C2.1@139.961,98.417 cw(c138.045,96.135) 141.025,96.135 ; C2.1@140.154,98.647 cw(c138.585,96.779) 141.025,96.779 ; U4.1@140.2,122.75 137.606,122.75 137.556,122.8 C13.1@137.4,122.8 ; C2.1@140.347,98.877 cw(c139.126,97.422) 141.025,97.422 ; C2.1@140.54,99.106 cw(c139.666,98.066) C2.1@141.025,98.066 ; R9.2@140.813,95.787 ccw(c140.301,96.299) 141.025,96.299 ccw(c141.749,96.299) R9.2@141.237,95.787 ; R9.2@141.025,95.575 C2.1@141.025,98.84
  Bottom Layer w0.4: C13.1@137.198,122.623 cw(c136.711,122.136) 137.4,122.136 ; 137.4,122.257 cw(c137.918,122.257) C13.1@137.552,122.623 ; C13.1@137.4,122.756 137.4,121.825 138.425,120.8 v2(139.1,120.8) ; v2@138.959,120.659 ccw(c138.617,120.317) 138.617,120.8 ccw(c138.617,121.283) v2@138.959,120.941
  Bottom Layer w0.5: v2@154.425,120.6 154.625,120.8 156.35,120.8 R20.1@157.45,119.7 159.3,119.7 Q4.2@159.35,119.65 ; v2@154.506,120.594 cw(c155.004,120.096) 155.004,120.8 ; R20.1@157.023,120.127 cw(c156.596,119.7) R20.1@157.2,119.7 ; R20.1@157.641,119.559 cw(c157.983,119.217) 157.983,119.7 cw(c157.983,120.183) R20.1@157.641,119.841 ; 158.721,119.7 cw(c158.721,119.046) Q4.2@159.184,119.509
  Bottom Layer w0.6: 138.665,98.3 ccw(c138.665,99.908) C2.1@139.864,98.837 ; C2.1@139.417,99.237 cw(c137.325,101.104) v2(137.325,98.3) 139.592,98.3 C2.1@139.8,98.508 ; C2.1@139.442,98.341 cw(c138.578,97.477) v2@139.8,97.477 ; R22.1@139.475,88 141.225,88 Q5.2@141.275,88.05 141.6,88.375 v2(141.6,90.3) ; v2@139.8,97.297 cw(c141.025,97.297) C2.1@140.293,98.279 ; v2(139.8,97.3) C2.1@139.8,98.508 ; C2.1@140.132,98.84 C2.1@140.094,98.802 C2.1@139.8,98.508 ; 140.767,88 ccw(c140.767,88.533) Q5.2@141.144,88.156 ; Q5.2@141.194,88.156 ccw(c140.214,89.136) 141.6,89.136 ; v2(147.95,90.3) 147.975,90.275 R6.1@147.975,88 148.025,87.95 Q3.2@149.775,87.95 ; R6.1@148.131,88.106 ccw(c148.508,88.483) 148.508,87.95
  other v2: 154.4,120.7
pads on no net: U1.5
copper on no net:
  other v3: 145.35,105.3

## Polygon pours and split planes (outlines as drawn)
AGND on Bottom Layer "GND" (solid, remove dead copper, pour order 39): 136,120.1 139.9,120.1 139.9,120.175 141.125,121.4 141.225,121.3 145.175,121.3 147.425,119.05 147.425,119 153.625,119 153.6,118.975 153.6,112.2 150.775,112.2 149.975,111.4 149.975,105.425 149.85,105.3 149.75,105.4 140.025,105.4 135.625,109.8 135.5,109.8 135.5,119.75 135.85,120.1
GND on Bottom Layer "GND" (solid, remove dead copper, pour order 41): 122.175,128.5 168.375,128.5 168.475,128.4 168.475,82.4 168.575,82.3 122.475,82.3 122.375,82.4
AGND on Mid-Layer 2 "GND" (solid, remove dead copper, pour order 38): 135.625,121.3 145.1,121.3 147.5,118.9 153.65,118.9 153.65,105.325 153.625,105.3 135.55,105.3 135.5,105.35 135.5,121.3
GND on Mid-Layer 2 "GND" (solid, remove dead copper, pour order 42): 122.575,128.1 168.475,128.1 168.475,82.3 168.575,82.2 122.675,82.2 122.575,82.3
GND on GND "GND" (solid, remove dead copper, pour order 44): 122.2,128.1 168.55,128.1 168.55,82.175 168.625,82.1 122.3,82.1 122.2,82.2
AGND on GND "GND" (solid, remove dead copper, pour order 37): 135.875,120.1 139.9,120.1 141.1,121.3 141.125,121.3 145.1,121.3 147.375,119.025 147.375,119 153.65,119 153.65,112.2 150.775,112.2 149.9,111.325 149.9,111.3 149.9,105.3 140,105.3 135.525,109.775 135.525,109.8 135.525,119.8 135.825,120.1
GND on Top Layer "GND" (solid, remove dead copper, pour order 43): 122.15,128.5 168.75,128.5 168.85,128.4 168.85,82 122.175,82 121.975,81.8
AGND on Top Layer "GND" (solid, remove dead copper, pour order 40): 136.073,120.107 140.05,120.107 140.075,120.082 141.194,121.2 145.172,121.2 147.459,118.914 153.65,118.914 153.6,118.865 153.6,112.058 150.617,112.058 150.318,111.76 149.995,111.437 149.995,106.096 149.324,105.425 149.324,105.4 140.175,105.4 135.625,109.946 135.625,109.971 135.625,119.709 136.023,120.107

## Keep-outs
Keep-Out Layer:
  circle w0.15: c153.8,105.3 r3
  circle w0.15: c145.4,96.7 r2.5
  lines w0.2: 122.647,103.829 ccw(c145.399,105.308) 122.85,101.934 ccw(c123.344,102.008) 123.344,101.508 123.932,101.508 ccw(c145.399,105.308) 124.499,99.108 124.129,99.108 ccw(c124.129,98.608) 123.652,98.458 ccw(c145.399,105.308) 143.919,82.556 cw(c145.399,82.308) 146.878,82.556 ccw(c145.399,105.308) 167.145,98.458 ccw(c166.668,98.608) 166.668,99.108 166.298,99.108 ccw(c145.399,105.308) 166.865,101.508 167.453,101.508 ccw(c167.453,102.008) 167.948,101.934 ccw(c145.399,105.308) 168.151,103.829 cw(c168.399,105.308) 168.151,106.787 ccw(c145.399,105.308) 146.878,128.06 cw(c145.399,128.308) 143.919,128.06 ccw(c145.399,105.308) 122.647,106.787 cw(c122.399,105.308) 122.647,103.829

## Other copper
Top Layer:
  pour cut-out: 153.775,112.2 153.775,108.575 153.85,108.5 153.225,108.5 153.25,108.525 153.25,112.2
  pour cut-out: 162.885,114.311 162.896,114.3 164.275,114.3 164.275,113.525 164.25,113.5 162.975,113.5 162.875,113.6
  pour cut-out: 161.7,106.4 161.8,106.3 165.35,106.3 165.35,104.45 165.3,104.4 162.15,104.4 161.75,104.8
  pour cut-out: 151.6,101.4 153.75,101.4 153.75,95.225 153.775,95.2 151.6,95.2
  pour cut-out: 148.075,105.9 148.075,104.7 142.625,104.7 142.625,105.9
GND:
  pour cut-out: 142.825,105.9 147.9,105.9 147.9,104.7 142.825,104.7
Mid-Layer 2:
  pour cut-out: 136.275,107.3 136.275,108.075 136.825,108.075 136.875,108.025 136.775,107.925 136.775,107.275
  pour cut-out: 154.05,108.4 154.05,109.175 154.6,109.175 154.65,109.125 154.55,109.025 154.55,108.375
  pour cut-out: 144.975,86.013 144.975,86.787 145.525,86.787 145.575,86.737 145.475,86.638 145.475,85.987
  pour cut-out: 148.1,105.9 148.1,104.7 142.65,104.7 142.65,105.9
Bottom Layer:
  pour cut-out: 135.55,105.736 135.55,108.75 135.65,108.85 136.325,108.85 136.35,108.825 136.35,105.85 136.45,105.75 135.65,105.75
  pour cut-out: 137.436,105.3 140.45,105.3 140.55,105.2 140.55,104.525 140.525,104.5 137.55,104.5 137.45,104.4 137.45,105.2
  pour cut-out: 145.65,122 147.625,122 147.625,121.6 145.65,121.6
  pour cut-out: 142.825,108 147.975,108 147.975,104.8 148.075,104.7 142.85,104.7
  pour cut-out: 133.6,109.5 133.6,106.55 133.65,106.5 128.925,106.5 128.8,106.625 128.8,109.5
  pour cut-out: 144.15,105.1 146.5,105.1 146.5,102.425 146.475,102.4 144.225,102.4
  pour cut-out: 148.075,105.9 148.075,104.7 142.65,104.7 142.65,105.9
  pour cut-out: 135.325,95.3 138.725,95.3 138.725,92.2 135.325,92.2
  pour cut-out: 128.875,93.7 131.925,93.7 131.925,92.2 128.875,92.2

## Silkscreen, mask and mechanical layers (free items; w line width, h text height)
Top Overlay:
  text "20160828" at 139.2,115.6 h1.5
  text "800U" at 137.65,114 h1.5
  text "R3N3_LED" at 141.25,114 h1.5
  text "_V1.2" at 141.25,112.4 h1.5
Bottom Overlay:
  lines w0.1: 133.025,114.6 133.025,111 140.025,111 140.025,114.6
  lines w0.15: 133.025,117.5 133.025,114.6 140.025,114.6 140.025,118.1 136.35,118.1 135.75,117.5 133.05,117.5 ; 142.125,93.3 143.85,93.3 ; 148.5,108.8 145.075,108.8 145.075,112.3 148.55,112.3 148.55,108.8 148.55,108.75 149.9,107.4 149.9,104.3 ; 137.125,91.1 137.125,91.1 ; 138.35,92.95 138.35,96.7 142.05,96.7 142.05,92.95 138.35,92.95 ; 143.675,90.4 146.525,90.4 146.525,93.3 143.675,93.3 143.675,90.4 ; 148.125,101.35 148.125,104.3 151.3,104.3 151.3,101.35 148.125,101.35
Mechanical 1:
  circle w0.2: c145.399,83.808 r0.001
  circle w0.15: c153.8,105.3 r3
  circle w0.15: c145.4,96.7 r2.5
  lines w0.005: -0.127,0.508 -0.127,210.508 296.873,210.508 296.873,0.508 -0.127,0.508
  lines w0.2: 143.891,128 ccw(c145.371,128.248) 146.85,128 ; 143.919,128.06 ccw(c145.399,105.308) 122.647,106.787 cw(c122.399,105.308) 122.647,103.829 ccw(c145.399,105.308) 122.85,101.934 ccw(c123.344,102.008) 123.344,101.508 123.932,101.508 ccw(c145.399,105.308) 124.499,99.108 124.129,99.108 ccw(c124.129,98.608) 123.652,98.458 ccw(c145.399,105.308) 143.919,82.556 cw(c145.399,82.308) 146.878,82.556 ccw(c145.399,105.308) 167.145,98.458 ccw(c166.668,98.608) 166.668,99.108 166.298,99.108 ccw(c145.399,105.308) 166.865,101.508 167.453,101.508 ccw(c167.453,102.008) 167.948,101.934 ccw(c145.399,105.308) 168.151,103.829 cw(c168.399,105.308) 168.151,106.787 ccw(c145.399,105.308) 146.878,128.06 ; 142.675,104.7 148.05,104.7 148.05,105.9 142.675,105.9 142.675,104.7
Mechanical 3:
  circle w0.1: c145.399,105.308 r21.5
  circle w0.15: c212.915,114.19 r2.5
  circle w0.15: c213.025,97.09 r2.5
  circle w0.15: c204.695,105.62 r2.5
  circle w0.15: c221.365,105.58 r2.5
  lines w0.2: 121.125,105.3 172.925,105.3 ; 127.052,123.654 163.68,87.026 ; 127.426,87.345 164.054,123.973 ; 145.4,79.075 145.4,129.15 ; 142.825,104.7 147.9,104.7 147.9,105.9 142.825,105.9 142.825,104.7
Mechanical 5:
  lines w0.15: 145.075,121.3 147.425,118.95 153.6,118.95 153.625,118.925 153.625,112.2
  lines w0.2: 145.075,121.3 141.125,121.3 139.925,120.1 135.875,120.1 135.525,119.75 135.525,109.8 140.025,105.3 149.9,105.3 149.9,111.3 150.8,112.2 153.625,112.2

## Text inside footprints (layer, text, board x,y; h text height)
CT1: Top Overlay "+" at 136.301,105.951 h1.5 r120